# EAGLE board InkTime (EAGLE 9.7.0)
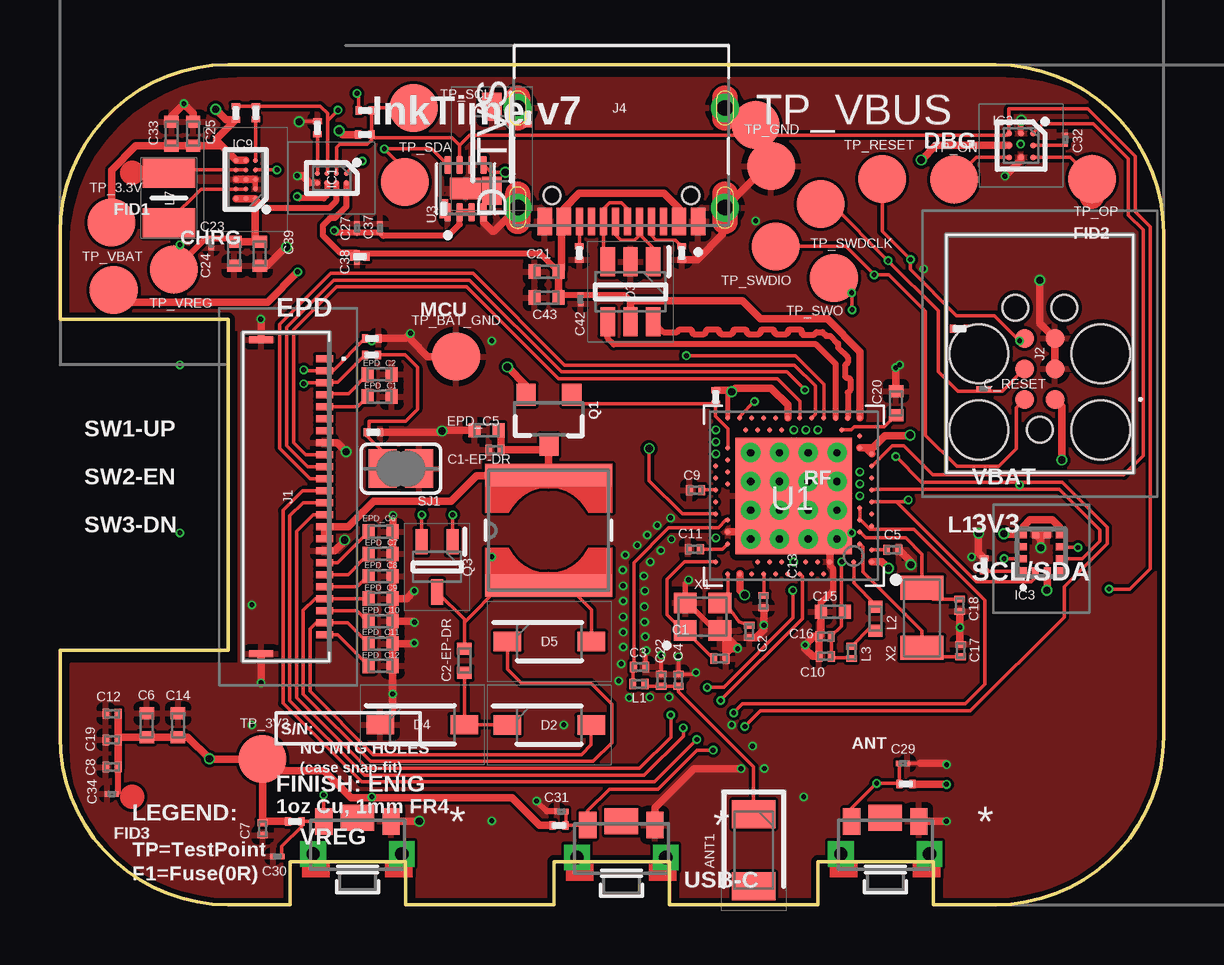
[diagram p0: board, top side]
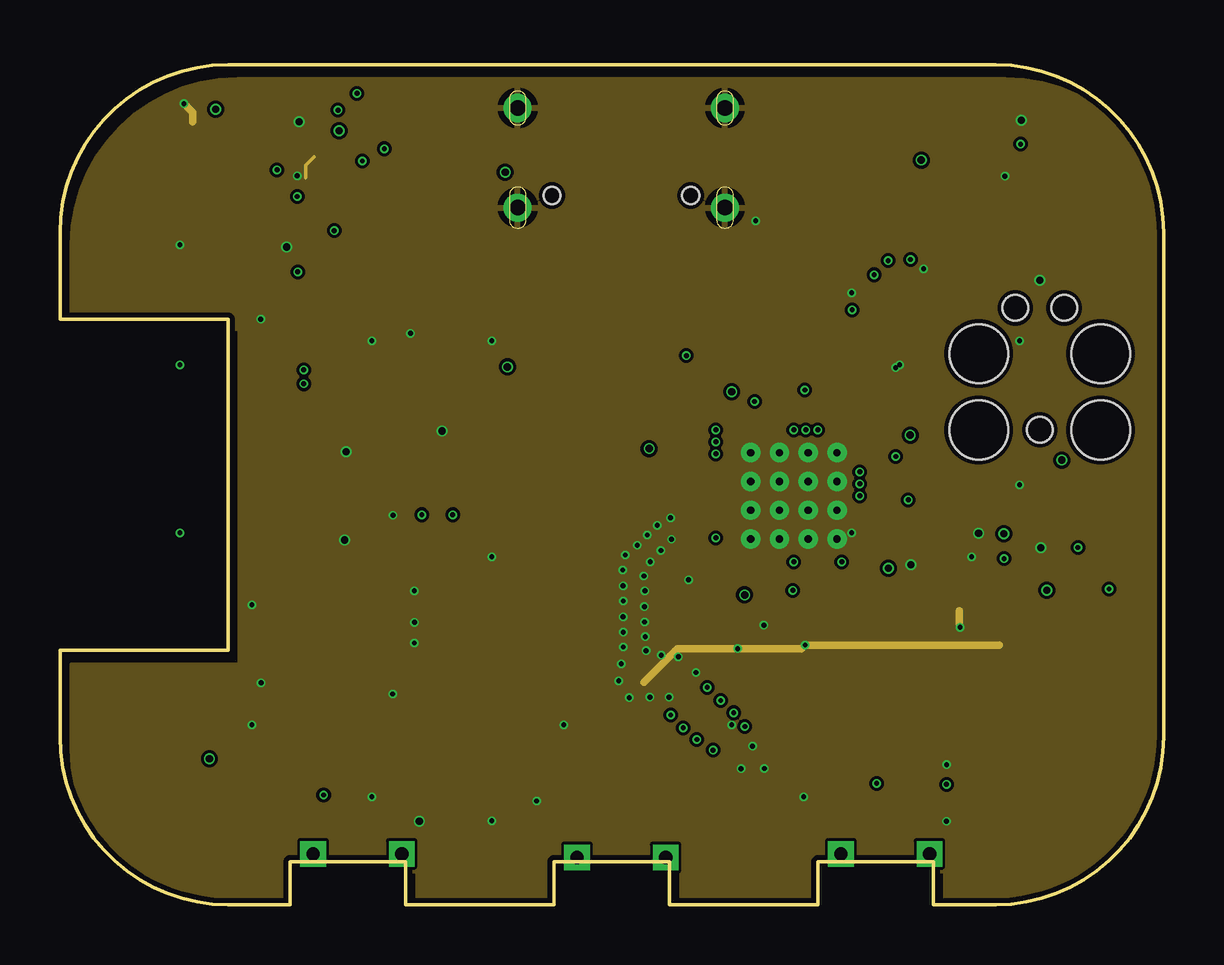
[diagram p1: board, inner layer Route2]
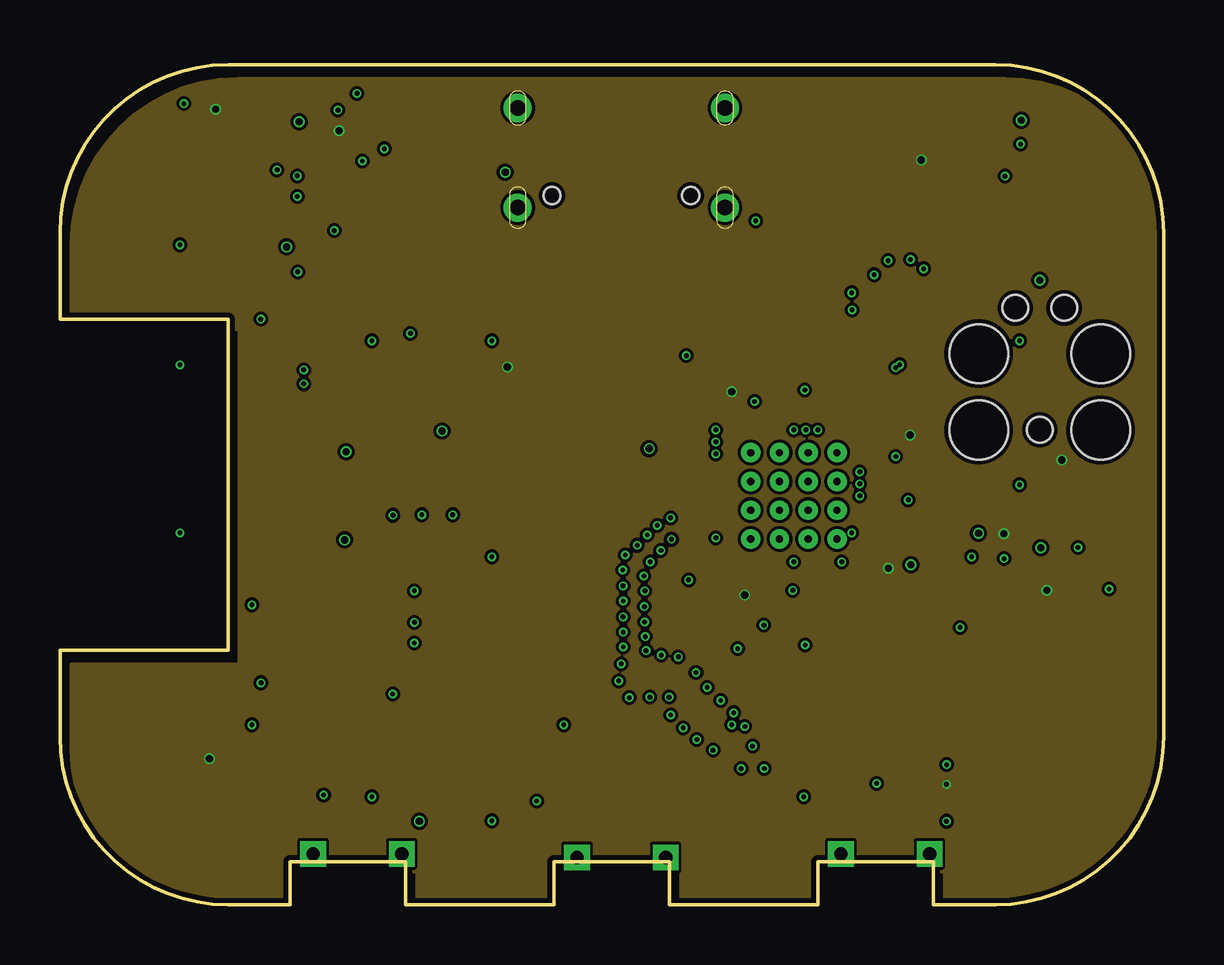
[diagram p2: board, inner layer Route15]
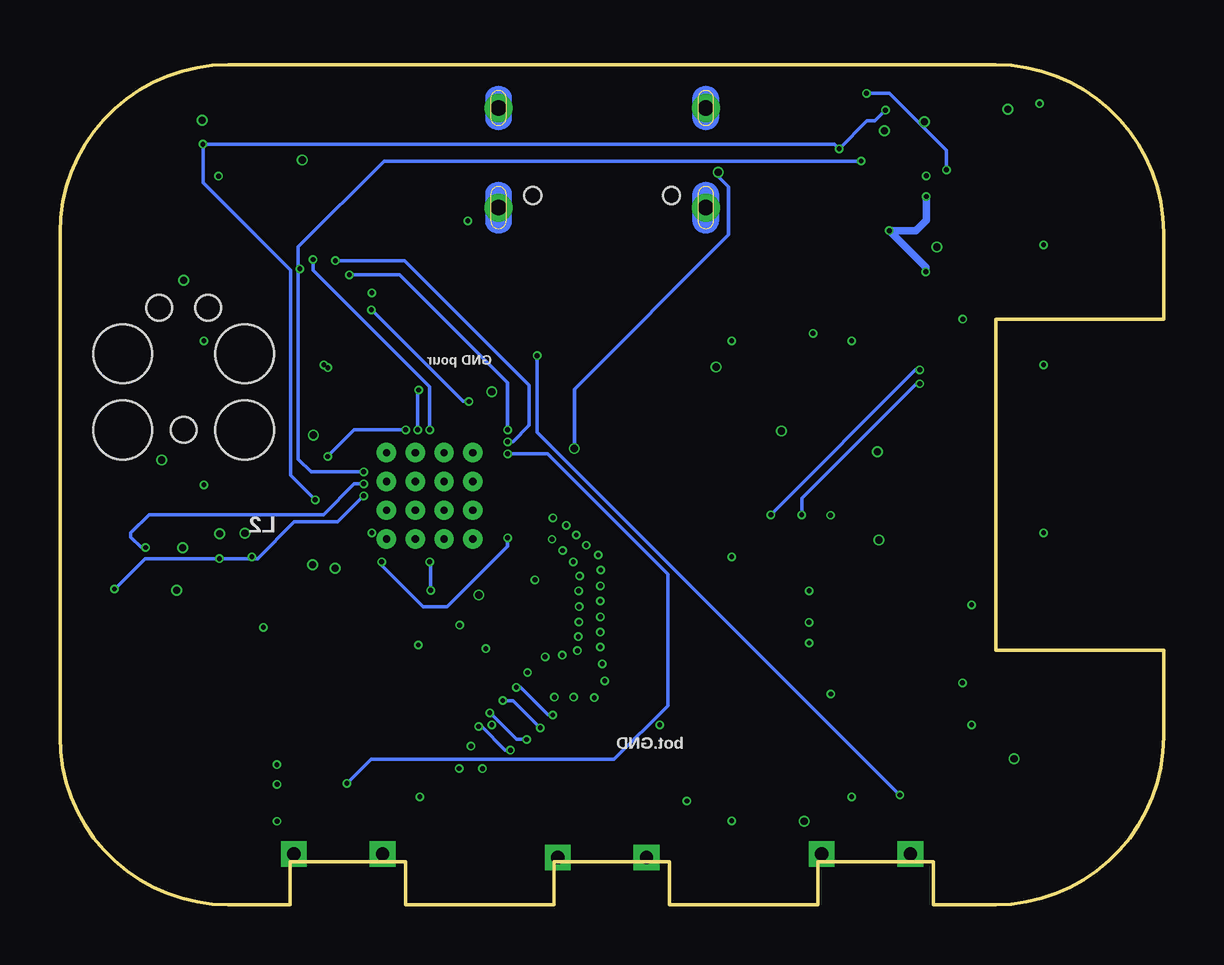
[diagram p3: board, bottom side, seen from below]

Size 46 x 35 mm. Coordinates in mm from the lower left corner, seen from the top.
Outline: 39,0 36.4,0 36.4,1.8 31.6,1.8 31.6,0 25.4,0 25.4,1.8 20.6,1.8 20.6,0 14.4,0 14.4,1.8 9.6,1.8 9.6,0 7,0 arc-90 0,7 0,10.6 7,10.6 7,24.4 0,24.4 0,28 arc-90 7,35 39,35 arc-90 46,28 46,7 arc-90 39,0
Copper layers (1+2*15+16): Top 0.035mm / dielectric 1mm / Route2 0.035mm / dielectric 0.15mm / Route15 0.035mm / dielectric 0.2mm / Bottom 0.035mm
Design rules "jlcpcb-2layers.dru *": minimum track width 5mil, minimum drill 0.2mm, track to track 5mil, track to pad 5mil, pad to pad 5mil, via to via 5mil, smd to smd 5mil, copper to edge 0.2mm, drill to drill 6mil, minimum pad ring 10mil, minimum via ring 3mil, stop-mask expansion 4mil, vias tented up to drill 999mm, thermal gap 10mil

## Footprints (pad centres in the part's own frame; a part is rotated, then mirrored left to right if it is on the bottom)
2450AT18B100E_ANTC3216X140N = smd 1.15 x 1.8: 1 -1.5,0; 2 1.5,0
NORDIC_NRF_3_RESC0201_L = smd 0.28 x 0.43: 1 -0.255,0; 2 0.255,0
NORDIC_NRF_3_RESC0402_L = smd 0.5 x 0.6: 1 -0.5,0; 2 0.5,0
GRM011R60J152KE01L_2_CAPC0201X13N = smd 0.22 x 0.23: 1 -0.185,0; 2 0.185,0
ESP32_C6_LIBRARY_5_SOD3716X135N = smd 1.15 x 0.8: 1 -1.75,0; 2 1.75,0
ESP32_C6_LIBRARY_3_SOT95P280X145-6N = smd 1.2 x 0.6: 1 -1.25,0.95; 2 -1.25,0; 3 -1.25,-0.95; 4 1.25,-0.95; 5 1.25,0; 6 1.25,0.95
CPF0201D7K68C1_0201 = smd 0.35 x 0.25: 1 0,0.275; 2 0,-0.275
BQ25180YBGR_BGA8C40P2X4_100X155X50 = smd 0.2 x 0.2: A1 -0.2,0.6; A2 0.2,0.6; B1 -0.2,0.2; B2 0.2,0.2; C1 -0.2,-0.2; C2 0.2,-0.2; D1 -0.2,-0.6; D2 0.2,-0.6
DRV2605YZFR_BGA9C50P3X3_144X144X62 = smd 0.25 x 0.25: A1 -0.5,0.5; A2 0,0.5; A3 0.5,0.5; B1 -0.5,0; B2 0,0; B3 0.5,0; C1 -0.5,-0.5; C2 0,-0.5; C3 0.5,-0.5
BMA423_BMA423 = smd 0.3 x 0.35: 1 -0.75,-0.775; 2 -0.25,-0.775; 3 0.25,-0.775; 4 0.75,-0.775; 7 0.75,0.775; 8 0.25,0.775; 9 -0.25,0.775; 10 -0.75,0.775 | smd 0.35 x 0.3: 5 0.775,-0.25; 6 0.775,0.25; 11 -0.775,0.25; 12 -0.775,-0.25
RT6160AWSC_BGA15C40P3X5_140X230X60 = smd 0.216 x 0.216: A1 -0.4,0.8; A2 0,0.8; A3 0.4,0.8; B1 -0.4,0.4; B2 0,0.4; B3 0.4,0.4; C1 -0.4,0; C2 0,0; C3 0.4,0; D1 -0.4,-0.4; D2 0,-0.4; D3 0.4,-0.4; E1 -0.4,-0.8; E2 0,-0.8; E3 0.4,-0.8
503480-2400_5034802400 = smd 0.3 x 0.7: 1 -5.75,1.525; 2 -5.25,1.525; 3 -4.75,1.525; 4 -4.25,1.525; 5 -3.75,1.525; 6 -3.25,1.525; 7 -2.75,1.525; 8 -2.25,1.525; 9 -1.75,1.525; 10 -1.25,1.525; 11 -0.75,1.525; 12 -0.25,1.525; 13 0.25,1.525; 14 0.75,1.525; 15 1.25,1.525; 16 1.75,1.525; 17 2.25,1.525; 18 2.75,1.525; 19 3.25,1.525; 20 3.75,1.525; 21 4.25,1.525; 22 4.75,1.525; 23 5.25,1.525; 24 5.75,1.525 | smd 0.3 x 1: MP1 -6.54,-1.125; MP2 6.54,-1.125
TC2030-IDC_TC2030IDC = smd 0.783 x 0.783: 1 -0.953,-0.635; 2 -0.953,0.635; 3 0.317,-0.635; 4 0.317,0.635; 5 1.588,-0.635; 6 1.588,0.635 | hole 2.451: -2.223,-2.54; -2.223,2.54; 0.952,-2.54; 0.952,2.54 | hole 1.067: -2.223,0; 2.857,-1.016; 2.857,1.016
KH-TYPE-C-16P_KINGHELM_KH-TYPE-C-16P = smd 0.6 x 1.15: A1_B12 -3.2,4.725; A4_B9 -2.4,4.725; A9_B4 2.4,4.725; A12_B1 3.2,4.725 | smd 0.3 x 1.15: A5 -1.25,4.725; A6 -0.25,4.725; A7 0.25,4.725; A8 1.25,4.725; B5 1.75,4.725; B6 0.75,4.725; B7 -0.75,4.725; B8 -1.75,4.725 | drill 0.65 pad 1.05: SH1 -4.32,0; SH2 4.32,0; SH3 -4.32,4.15; SH4 4.32,4.15 | hole 0.7: -2.89,3.65; 2.89,3.65
NORDIC_NRF_2_RESC0201_L = smd 0.28 x 0.43: 1 -0.255,0; 2 0.255,0
NORDIC_NRF_2_RESC0402_L = smd 0.5 x 0.6: 1 -0.5,0; 2 0.5,0
ESP32_C6_LIBRARY_2_IND_4828-WE-TPC_WRE = smd 0.9 x 5.3: 1 -2.286,0; 2 2.286,0
MLP2016SR47MT0S1_INDC2016X100N = smd 1.2 x 2.2: 1 -1.028,0; 2 1.028,0
ESP32_C6_LIBRARY_4_ESP32_C6_LIBRARY_4_ESP32_C6_LIBRARY_4_ESP32_C6_LIBRARY_4_ESP32_WROVER_SPARKFUN-DISCRETESEMI_SOT23-3 = smd 0.8 x 0.9: 1 -0.95,-1; 2 0.95,-1; 3 0,1.1
ESP32_C6_LIBRARY_6_SOT65P210X110-3N = smd 1.05 x 0.5: 1 -1.05,0.65; 2 -1.05,-0.65; 3 1.05,0
ESP32_C6_LIBRARY_7_JUMPER_SJ = smd 1.168 x 1.6: 1 -0.762,0; 2 0.762,0
2025-10-22_07-23-44_LIBRARY_SW_EVP-AKE31A_PAN = smd 0.711 x 1.092: 1 -1.4,-0.972; 2 1.4,-0.972 | drill 0.559 pad 0.914 square: 3 -1.848,0.381; 4 1.848,0.381 | smd 1.397 x 1.092: 5 0,-1.124
HECTOR_WATCH_1_TP20R = smd 2 x 2: TP 0,0
NORDIC_NRF_4_AQFN50P700X700X85_HS-74N = smd 4.85 x 4.85: P$74 0,0 | drill 0.3 pad 0.6: P$75 -1.8,1.8; P$76 -0.6,1.8; P$77 0.6,1.8; P$78 1.8,1.8; P$79 -1.8,0.6; P$80 -0.6,0.6; P$81 0.6,0.6; P$82 1.8,0.6; P$83 -1.8,-0.6; P$84 -0.6,-0.6; P$85 0.6,-0.6; P$86 1.8,-0.6; P$87 -1.8,-1.8; P$88 -0.6,-1.8; P$89 0.6,-1.8; P$90 1.8,-1.8 | smd 0.2 x 0.2: P$A8 -1.25,3.25; P$A10 -0.75,3.25; P$A12 -0.25,3.25; P$A14 0.25,3.25; P$A16 0.75,3.25; P$A18 1.25,3.25; P$A20 1.75,3.25; P$A22 2.25,3.25; P$A23 2.75,3.25; P$AA24 3.25,-2.25; P$AB2 -2.75,-2.5; P$AC5 -2,-2.75; P$AC9 -1,-2.75; P$AC11 -0.5,-2.75; P$AC13 0,-2.75; P$AC15 0.5,-2.75; P$AC17 1,-2.75; P$AC19 1.5,-2.75; P$AC21 2,-2.75; P$AC24 3.25,-2.75; P$AD2 -2.75,-3.25; P$AD4 -2.25,-3.25; P$AD6 -1.75,-3.25; P$AD8 -1.25,-3.25; P$AD10 -0.75,-3.25; P$AD12 -0.25,-3.25; P$AD14 0.25,-3.25; P$AD16 0.75,-3.25; P$AD18 1.25,-3.25; P$AD20 1.75,-3.25; P$AD22 2.25,-3.25; P$AD23 2.75,-3.25; P$B1 -3.25,2.75; P$B3 -2.5,2.75; P$B5 -2,2.75; P$B7 -1.5,2.75; P$B9 -1,2.75; P$B11 -0.5,2.75; P$B13 0,2.75; P$B15 0.5,2.75; P$B17 1,2.75; P$B19 1.5,2.75; P$B24 3.25,2.75; P$C1 -3.25,2.25; P$D2 -2.75,2; P$D23 2.75,2; P$E24 3.25,1.75; P$F2 -2.75,1.5; P$F23 2.75,1.5; P$G1 -3.25,1.25; P$H2 -2.75,1; P$H23 2.75,1; P$J1 -3.25,0.75; P$J24 3.25,0.75; P$K2 -2.75,0.5; P$L1 -3.25,0.25; P$L24 3.25,0.25; P$M2 -2.75,0; P$N1 -3.25,-0.25; P$N24 3.25,-0.25; P$P2 -2.75,-0.5; P$P23 2.75,-0.5; P$R1 -3.25,-0.75; P$R24 3.25,-0.75; P$T2 -2.75,-1; P$T23 2.75,-1; P$U1 -3.25,-1.25; P$U24 3.25,-1.25; P$V23 2.75,-1.5; P$W1 -3.25,-1.75; P$W24 3.25,-1.75; P$Y2 -2.75,-2; P$Y23 2.75,-2
ESP32_C6_LIBRARY_SON50P200X200X80-9N = smd 0.76 x 0.27: 1 -0.985,0.75; 2 -0.985,0.25; 3 -0.985,-0.25; 4 -0.985,-0.75; 5 0.985,-0.75; 6 0.985,-0.25; 7 0.985,0.25; 8 0.985,0.75 | smd 0.9 x 1.3: 9 0,0
NORDIC_NRF_BT-XTAL_2016_N = smd 0.95 x 0.85: 1 -0.725,-0.575; 2 0.725,-0.575; 3 0.725,0.575; 4 -0.725,0.575
NORDIC_NRF_1_XTAL_3215_N = smd 1 x 1.8: 1 -1.25,0; 2 1.25,0

## Placement (x,y rotation side)
ANT1  2450AT18B100E_2450AT18B100E  [2450AT18B100E_ANTC3216X140N]  28.92,2.27 270 top
C1  12pF  [NORDIC_NRF_3_RESC0201_L]  27.51,10.26 0 top
C1-EP-DR  10uF  [NORDIC_NRF_3_RESC0402_L]  17.78,19.77 180 top
C2  12pF  [NORDIC_NRF_3_RESC0201_L]  28.73,11.39 270 top
C2-EP-DR  4.7uF/25V  [NORDIC_NRF_3_RESC0402_L]  16.86,10.16 90 top
C3  1pF  [NORDIC_NRF_3_RESC0201_L]  24.16,9.91 0 top
C4  1pF  [NORDIC_NRF_3_RESC0201_L]  25.78,9.36 90 top
C5  100nF  [NORDIC_NRF_3_RESC0201_L]  34.71,14.79 0 top
C6  4.7uF  [NORDIC_NRF_3_RESC0402_L]  3.62,7.48 90 top
C7  100nF  [NORDIC_NRF_3_RESC0201_L]  8.45,3.16 270 top
C8  100nF  [NORDIC_NRF_3_RESC0201_L]  2.17,5.74 180 top
C9  820pF (N.C.)  [NORDIC_NRF_3_RESC0201_L]  26.49,17.27 180 top
C10  N.C.  [NORDIC_NRF_3_RESC0201_L]  31.9,10.35 180 top
C11  100pF  [NORDIC_NRF_3_RESC0201_L]  26.44,14.81 180 top
C12  100nF  [NORDIC_NRF_3_RESC0201_L]  2.17,7.96 180 top
C13  N.C.  [NORDIC_NRF_3_RESC0201_L]  29.32,12.63 270 top
C14  4.7uF  [NORDIC_NRF_3_RESC0402_L]  4.92,7.48 90 top
C15  1uF  [NORDIC_NRF_3_RESC0402_L]  32.21,12.21 180 top
C16  47nF  [NORDIC_NRF_3_RESC0201_L]  31.89,11.18 180 top
C17  12pF  [NORDIC_NRF_3_RESC0201_L]  37.54,10.59 270 top
C18  12pF  [NORDIC_NRF_3_RESC0201_L]  37.5,12.48 90 top
C19  100nF  [NORDIC_NRF_3_RESC0201_L]  2.17,6.87 180 top
C20  4.7uF  [NORDIC_NRF_3_RESC0402_L]  34.85,20.9 90 top
C21  4.7uF  [NORDIC_NRF_3_RESC0402_L]  20.29,26.38 180 top
C22  N.C.  [NORDIC_NRF_3_RESC0201_L]  25.06,9.36 90 top
C23  0.1uF  [GRM011R60J152KE01L_2_CAPC0201X13N]  6.31,27.57 270 top
C24  10uF  [NORDIC_NRF_3_RESC0402_L]  7.27,27.12 90 top
C25  22uF  [NORDIC_NRF_3_RESC0402_L]  5.55,32.13 90 top
C27  0.1uF  [GRM011R60J152KE01L_2_CAPC0201X13N]  12.38,28.19 90 top
C29  1uF  [GRM011R60J152KE01L_2_CAPC0201X13N]  35.14,5.89 0 top
C30  1uF  [GRM011R60J152KE01L_2_CAPC0201X13N]  9.06,2.02 180 top
C31  1uF  [GRM011R60J152KE01L_2_CAPC0201X13N]  20.9,3.89 180 top
C32  1uF  [GRM011R60J152KE01L_2_CAPC0201X13N]  41.9,31.88 90 top
C33  22uF  [NORDIC_NRF_3_RESC0402_L]  4.65,32.12 90 top
C34  0.1uF  [GRM011R60J152KE01L_2_CAPC0201X13N]  2.16,4.62 180 top
C37  1uF  [GRM011R60J152KE01L_2_CAPC0201X13N]  13.34,28.19 90 top
C38  1uF  [GRM011R60J152KE01L_2_CAPC0201X13N]  12.38,26.97 270 top
C39  10uF  [NORDIC_NRF_3_RESC0402_L]  8.33,27.12 270 top
C42  0.1uF  [GRM011R60J152KE01L_2_CAPC0201X13N]  21.7,25.23 270 top
C43  4.7uF  [NORDIC_NRF_3_RESC0402_L]  20.29,25.3 180 top
C_RESET  100nF/10V  [GRM011R60J152KE01L_2_CAPC0201X13N]  38.5,21.5 0 top
D2  MBR0530  [ESP32_C6_LIBRARY_5_SOD3716X135N]  20.39,7.49 0 top
D3  USBLC6-2SC6Y  [ESP32_C6_LIBRARY_3_SOT95P280X145-6N]  23.78,25.54 270 top
D4  MBR0530  [ESP32_C6_LIBRARY_5_SOD3716X135N]  15.1,7.5 0 top
D5  MBR0530  [ESP32_C6_LIBRARY_5_SOD3716X135N]  20.4,10.97 0 top
D_TVS  MBR0530 (TVS)  [ESP32_C6_LIBRARY_5_SOD3716X135N]  18,31.5 270 top
EPD_C1  1uF/50V  [NORDIC_NRF_3_RESC0402_L]  13.33,21.17 180 top
EPD_C2  1uF/50V  [NORDIC_NRF_3_RESC0402_L]  13.33,22.1 180 top
EPD_C5  0.1uF/50V  [NORDIC_NRF_3_RESC0201_L]  18.13,18.95 0 top
EPD_C6  1uF/50V  [NORDIC_NRF_3_RESC0402_L]  13.37,15.55 180 top
EPD_C7  1uF/50V  [NORDIC_NRF_3_RESC0402_L]  13.37,14.62 180 top
EPD_C8  1uF/50V  [NORDIC_NRF_3_RESC0402_L]  13.37,13.69 180 top
EPD_C9  1uF/50V  [NORDIC_NRF_3_RESC0402_L]  13.37,12.76 180 top
EPD_C10  1uF/50V  [NORDIC_NRF_3_RESC0402_L]  13.37,11.82 180 top
EPD_C11  1uF/50V  [NORDIC_NRF_3_RESC0402_L]  13.37,10.88 180 top
EPD_C12  1uF/50V  [NORDIC_NRF_3_RESC0402_L]  13.37,9.95 180 top
F1  0R (FUSE)  [CPF0201D7K68C1_0201]  19.5,32.8 0 top
IC1  BQ25180YBGR_BQ25180YBGR  [BQ25180YBGR_BGA8C40P2X4_100X155X50]  11.33,30.28 270 top
IC2  DRV2605YZFR_DRV2605YZFR  [DRV2605YZFR_BGA9C50P3X3_144X144X62]  40.06,31.64 270 top
IC3  BMA423_BMA423  [BMA423_BMA423]  40.9,14.67 0 top
IC9  RT6160AWSC_RT6160AWSC  [RT6160AWSC_BGA15C40P3X5_140X230X60]  7.74,30.22 180 top
J1  503480-2400_503480-2400  [503480-2400_5034802400]  9.5,17 270 top
J2  TC2030-IDC_TC2030-IDC  [TC2030-IDC_TC2030IDC]  40.84,22.01 90 top
J4  KH-TYPE-C-16P  [KH-TYPE-C-16P_KINGHELM_KH-TYPE-C-16P]  23.4,33.2 180 top
L1  3.9nH  [NORDIC_NRF_2_RESC0201_L]  24.13,9.2 0 top
L2  10uH  [NORDIC_NRF_2_RESC0402_L]  33.99,11.92 270 top
L3  15nH  [NORDIC_NRF_2_RESC0201_L]  33,10.52 270 top
L5  68uH  [ESP32_C6_LIBRARY_2_IND_4828-WE-TPC_WRE]  20.37,15.6 90 top
L7  MLP2016SR47MT0S1_FTC252012SR47MBCA  [MLP2016SR47MT0S1_INDC2016X100N]  4.54,29.45 90 top
Q1  20V/4.2A/52mΩ/1.4W  [ESP32_C6_LIBRARY_4_ESP32_C6_LIBRARY_4_ESP32_C6_LIBRARY_4_ESP32_C6_LIBRARY_4_ESP32_WROVER_SPARKFUN-DISCRETESEMI_SOT23-3]  20.38,20.25 180 top
Q3  SI1308EDL-T1-GE3  [ESP32_C6_LIBRARY_6_SOT65P210X110-3N]  15.72,14.08 270 top
R1_EP_DR  0.47  [CPF0201D7K68C1_0201]  12.99,22.91 270 top
R1_USB  5K1  [CPF0201D7K68C1_0201]  25.92,27.16 180 top
R2  0  [CPF0201D7K68C1_0201]  8.16,33 180 top
R2_EP_DR  10K  [CPF0201D7K68C1_0201]  13,23.6 270 top
R2_USB  5K1  [CPF0201D7K68C1_0201]  21.65,27.16 0 top
R3  0  [CPF0201D7K68C1_0201]  38.52,14.17 180 top
R4  0  [CPF0201D7K68C1_0201]  12.72,33.09 90 top
R5  10K  [CPF0201D7K68C1_0201]  9.79,3.47 270 top
R7  10K  [CPF0201D7K68C1_0201]  35.26,5.03 90 top
R8  10K  [CPF0201D7K68C1_0201]  20.8,3.31 270 top
R9  10K  [CPF0201D7K68C1_0201]  10.73,32.37 0 top
R17  3K3  [CPF0201D7K68C1_0201]  12.71,32.09 90 top
R18  3K3  [CPF0201D7K68C1_0201]  7.33,32.99 180 top
R_ALERT  100K  [CPF0201D7K68C1_0201]  16,29 180 top
R_PMIC_INT  100K  [CPF0201D7K68C1_0201]  12.5,27 90 top
R_PWR_EPD  10K  [CPF0201D7K68C1_0201]  27.33,21.16 180 top
R_RESET  10K  [CPF0201D7K68C1_0201]  37.5,24 90 top
R_TYPE_SEL  2.2  [CPF0201D7K68C1_0201]  13.06,19.69 270 top
SJ1  SJ  [ESP32_C6_LIBRARY_7_JUMPER_SJ]  14.21,18.17 180 top
SW_DN  2025-10-22_07-23-44_LIBRARY_EVP-AKE31ASW_EVP-AKE31A_PAN  [2025-10-22_07-23-44_LIBRARY_SW_EVP-AKE31A_PAN]  34.4,2.5 180 top
SW_ENT  2025-10-22_07-23-44_LIBRARY_EVP-AKE31ASW_EVP-AKE31A_PAN  [2025-10-22_07-23-44_LIBRARY_SW_EVP-AKE31A_PAN]  23.4,2.35 180 top
SW_UP  2025-10-22_07-23-44_LIBRARY_EVP-AKE31ASW_EVP-AKE31A_PAN  [2025-10-22_07-23-44_LIBRARY_SW_EVP-AKE31A_PAN]  12.4,2.5 180 top
TP_3.3V  HECTOR_WATCH_1_TPTP20R  [HECTOR_WATCH_1_TP20R]  2.15,28.43 0 top
TP_3V3  HECTOR_WATCH_1_TPTP20R  [HECTOR_WATCH_1_TP20R]  8.43,6.07 0 top
TP_BAT_GND  HECTOR_WATCH_1_TPTP20R  [HECTOR_WATCH_1_TP20R]  16.51,22.84 0 top
TP_GND  HECTOR_WATCH_1_TPTP20R  [HECTOR_WATCH_1_TP20R]  29.64,30.78 0 top
TP_ON  HECTOR_WATCH_1_TPTP20R  [HECTOR_WATCH_1_TP20R]  37.27,30.22 0 top
TP_OP  HECTOR_WATCH_1_TPTP20R  [HECTOR_WATCH_1_TP20R]  43.02,30.24 0 top
TP_RESET  HECTOR_WATCH_1_TPTP20R  [HECTOR_WATCH_1_TP20R]  34.28,30.25 0 top
TP_SCL  HECTOR_WATCH_1_TPTP20R  [HECTOR_WATCH_1_TP20R]  14.74,33.2 0 top
TP_SDA  HECTOR_WATCH_1_TPTP20R  [HECTOR_WATCH_1_TP20R]  14.37,30.12 0 top
TP_SWDCLK  HECTOR_WATCH_1_TPTP20R  [HECTOR_WATCH_1_TP20R]  31.7,29.2 0 top
TP_SWDIO  HECTOR_WATCH_1_TPTP20R  [HECTOR_WATCH_1_TP20R]  29.84,27.42 0 top
TP_SWO  HECTOR_WATCH_1_TPTP20R  [HECTOR_WATCH_1_TP20R]  32.26,26.11 0 top
TP_VBAT  HECTOR_WATCH_1_TPTP20R  [HECTOR_WATCH_1_TP20R]  2.24,25.61 0 top
TP_VBUS  VBUS  [HECTOR_WATCH_1_TP20R]  29,32.5 0 top
TP_VREG  HECTOR_WATCH_1_TPTP20R  [HECTOR_WATCH_1_TP20R]  4.75,26.47 0 top
U1  NORDIC_NRF_4_NRF52840_QF  [NORDIC_NRF_4_AQFN50P700X700X85_HS-74N]  30.59,17.04 180 top
U3  MAX17048G+T10  [ESP32_C6_LIBRARY_SON50P200X200X80-9N]  16.91,29.84 90 top
X1  32MHz  [NORDIC_NRF_BT-XTAL_2016_N]  26.79,12 0 top
X2  32.768kHz  [NORDIC_NRF_1_XTAL_3215_N]  35.93,11.95 270 top

## Library data of the parts
ANT1 = InkTime_v5; ARROW_PART_NUMBER: 2450AT18B100E; ARROW_PRICE-STOCK: https://www.arrow.com/en/products/2450at18b100e/johanson-dielectrics?utm_currency=USD&region=nac; DESCRIPTION: Antennas 2.45GHz ANTENNA; HEIGHT: 1.4mm; MANUFACTURER_NAME: JOHANSON TECHNOLOGY; MANUFACTURER_PART_NUMBER: 2450AT18B100E; MOUSER_PART_NUMBER: 609-2450AT18B100E; MOUSER_PRICE-STOCK: https://www.mouser.co.uk/ProductDetail/Johanson-Technology/2450AT18B100E?qs=yCnrNFeXz%252Bh5MFsFIXGZGA%3D%3D
C1 C1-EP-DR C2 C2-EP-DR C3-C22 C24 C25 C33 C39 C43 C_RESET D_TVS EPD_C1 EPD_C2 EPD_C5-EPD_C12 F1 L1-L3 R1_EP_DR R1_USB R2 R2_EP_DR R2_USB R3-R5 R7-R9 R17 R18 R_ALERT R_PMIC_INT R_PWR_EPD R_RESET R_TYPE_SEL SJ1 TP_3.3V TP_3V3 TP_BAT_GND TP_GND TP_ON TP_OP TP_RESET TP_SCL TP_SDA TP_SWDCLK TP_SWDIO TP_SWO TP_VBAT TP_VBUS TP_VREG U1 X1 X2 = InkTime_v5
C23 C27 C29-C32 C34 C37 C38 C42 = InkTime_v5; AVAILABILITY: In Stock; CHECK_PRICES: https://www.snapeda.com/parts/GRM011R60J152KE01L/Murata/view-part/?ref=eda; DESCRIPTION: SMD Capacitor X5R(EIA) with Capacitance: 1500pF Tol. 10%. Rated Voltage: 6.3Vdc; MF: Murata; MP: GRM011R60J152KE01L; PACKAGE: 0201 Murata; PRICE: None; SNAPEDA_LINK: https://www.snapeda.com/parts/GRM011R60J152KE01L/Murata/view-part/?ref=snap
D2 D4 D5 = InkTime_v5; AVAILABILITY: In Stock; CHECK_PRICES: https://www.snapeda.com/parts/MBR0530/Onsemi/view-part/?ref=eda; DESCRIPTION: Diode Schottky 30 V 500mA Surface Mount SOD-123; MF: ON Semiconductor; MP: MBR0530; PACKAGE: SOD-123-2 ON Semiconductor; PRICE: None; PURCHASE-URL: https://www.snapeda.com/api/url_track_click_mouser/?unipart_id=179458&manufacturer=ON Semiconductor&part_name=MBR0530&search_term=None; SNAPEDA_LINK: https://www.snapeda.com/parts/MBR0530/Onsemi/view-part/?ref=snap
D3 = InkTime_v5; AVAILABILITY: In Stock; CHECK_PRICES: https://www.snapeda.com/parts/USBLC6-2SC6Y/STMicroelectronics/view-part/?ref=eda; DESCRIPTION: 17V Clamp 5A (8/20µs) Ipp Tvs Diode Surface Mount SOT-23-6; MF: STMicroelectronics; MP: USBLC6-2SC6Y; PACKAGE: SOT-23-6 STMicroelectronics; PRICE: None; SNAPEDA_LINK: https://www.snapeda.com/parts/USBLC6-2SC6Y/STMicroelectronics/view-part/?ref=snap
IC1 = InkTime_v5; ARROW_PART_NUMBER: BQ25180YBGR; ARROW_PRICE-STOCK: https://www.arrow.com/en/products/bq25180ybgr/texas-instruments?utm_currency=USD&region=nac; DESCRIPTION: Charger IC Lithium Ion/Polymer, Lithium Iron Phosphate 8-DSBGA (1.6x1.1); HEIGHT: 0.5mm; MANUFACTURER_NAME: Texas Instruments; MANUFACTURER_PART_NUMBER: BQ25180YBGR; MOUSER_PART_NUMBER: 595-BQ25180YBGR; MOUSER_PRICE-STOCK: https://www.mouser.co.uk/ProductDetail/Texas-Instruments/BQ25180YBGR?qs=doiCPypUmgEWjAK%252BJAX6Tw%3D%3D
IC2 = InkTime_v5; ARROW_PART_NUMBER: DRV2605YZFR; ARROW_PRICE-STOCK: https://www.arrow.com/en/products/drv2605yzfr/texas-instruments?region=nac; DESCRIPTION: Haptic Driver for ERM/LRA with Built-In Library and Smart Loop Architecture; HEIGHT: 0.625mm; MANUFACTURER_NAME: Texas Instruments; MANUFACTURER_PART_NUMBER: DRV2605YZFR
IC3 = InkTime_v5; ARROW_PART_NUMBER: BMA423; ARROW_PRICE-STOCK: https://www.arrow.com/en/products/bma423/bosch; DESCRIPTION: Accelerometers Triaxial low-g 12bit Acceleration Sensor; HEIGHT: 1mm; MANUFACTURER_NAME: BOSCH; MANUFACTURER_PART_NUMBER: BMA423; MOUSER_PART_NUMBER: 262-BMA423; MOUSER_PRICE-STOCK: https://www.mouser.co.uk/ProductDetail/Bosch-Sensortec/BMA423?qs=HXFqYaX1Q2xC%252BSgeGoX3mg%3D%3D
IC9 = InkTime_v5; DESCRIPTION: Buck-Boost Regulator Positive Output Step-Up/Step-Down I2C DC-DC Controller IC 15-WL-CSP (BSC) (1.4x2.3); HEIGHT: 0.6mm; MANUFACTURER_NAME: RICHTEK; MANUFACTURER_PART_NUMBER: RT6160AWSC; MOUSER_PART_NUMBER: 835-RT6160AWSC; MOUSER_PRICE-STOCK: https://www.mouser.co.uk/ProductDetail/Richtek/RT6160AWSC?qs=amGC7iS6iy%2FLd9PSoixZXQ%3D%3D
J1 = InkTime_v5; DESCRIPTION: FFC & FPC Connectors 0.5mm FPC RA SMT Dual Contact 24Ckt; HEIGHT: 1.87mm; MANUFACTURER_NAME: Molex; MANUFACTURER_PART_NUMBER: 503480-2400; MOUSER_PART_NUMBER: 538-503480-2400; MOUSER_PRICE-STOCK: https://www.mouser.co.uk/ProductDetail/Molex/503480-2400?qs=OAhjpuo3Vu7efIoxFh9AOw%3D%3D
J2 = InkTime_v5; DESCRIPTION: CABLE ADAPTER 6 POS; HEIGHT: 19mm; MANUFACTURER_NAME: Tag Connect; MANUFACTURER_PART_NUMBER: TC2030-IDC
J4 = InkTime_v5; AVAILABILITY: Not in stock; CHECK_PRICES: https://www.snapeda.com/parts/KH-TYPE-C-16P/Kinghelm/view-part/?ref=eda; MF: kinghelm; MP: KH-TYPE-C-16P; PACKAGE: None; PRICE: None; SNAPEDA_LINK: https://www.snapeda.com/parts/KH-TYPE-C-16P/Kinghelm/view-part/?ref=snap
L5 = InkTime_v5; COPYRIGHT: Copyright (C) 2024 Ultra Librarian. All rights reserved.; MANUFACTURER_PART_NUMBER: 744043680; MFR_NAME: Wurth Electronics
L7 = InkTime_v5; DESCRIPTION: SMD / SMT Inductors (Coils), L=0.47?H, L x W x T :; HEIGHT: 1mm; JLCPCB: https://jlcpcb.com/partdetail/6763488-FTC252012SR47MBCA/C5832368; MANUFACTURER_NAME: TDK; MANUFACTURER_PART_NUMBER: FTC252012SR47MBCA
Q1 = InkTime_v5; PROD_ID: TRAN-14388
Q3 = InkTime_v5; AVAILABILITY: In Stock; CHECK_PRICES: https://www.snapeda.com/parts/SI1308EDL-T1-GE3/Vishay+Siliconix/view-part/?ref=eda; DESCRIPTION: Si1308EDL-T1-GE3 N-channel MOSFET Transistor, 1.5 A, 30 V, 3-Pin SC-70 | Siliconix / Vishay SI1308EDL-T1-GE3; MF: Vishay Siliconix; MP: SI1308EDL-T1-GE3; PACKAGE: SOT-323 Vishay Semiconductor; PRICE: None; PURCHASE-URL: https://www.snapeda.com/api/url_track_click_mouser/?unipart_id=274603&manufacturer=Vishay Siliconix&part_name=SI1308EDL-T1-GE3&search_term=None; SNAPEDA_LINK: https://www.snapeda.com/parts/SI1308EDL-T1-GE3/Vishay+Siliconix/view-part/?ref=snap
SW_DN SW_ENT SW_UP = InkTime_v5; COPYRIGHT: Copyright (C) 2025 Ultra Librarian. All rights reserved.; DIGI-KEY_PART_NUMBER_1: P123437TR-ND; DIGI-KEY_PART_NUMBER_2: P123437CT-ND; DIGI-KEY_PART_NUMBER_3: P123437DKR-ND; MANUFACTURER_NAME: Panasonic; MANUFACTURER_PART_NUMBER: EVP-AKE31A
U3 = InkTime_v5; AVAILABILITY: In Stock; CHECK_PRICES: https://www.snapeda.com/parts/MAX17048G+T10/Analog+Devices/view-part/?ref=eda; DESCRIPTION: 3µA 1-Cell/2-Cell Fuel Gauge with ModelGauge; MF: Analog Devices; MP: MAX17048G+T10; PACKAGE: TDFN-8 Maxim; PRICE: None; PURCHASE-URL: https://www.snapeda.com/api/url_track_click_mouser/?unipart_id=329239&manufacturer=Analog Devices&part_name=MAX17048G+T10&search_term=None; SNAPEDA_LINK: https://www.snapeda.com/parts/MAX17048G+T10/Analog+Devices/view-part/?ref=snap

## Nets
3V3: C6.1 C7.1 C8.1 C12.1 C14.1 C19.1 C25.1 C33.1 C34.1 IC2.C2 IC3.3 IC3.7 IC3.10 IC9.E2 IC9.E3 J2.1 Q1.2 R5.2 R7.2 R8.2 R17.1 R18.1 R_ALERT.2 R_PMIC_INT.2 R_PWR_EPD.2 R_RESET.2 TP_3.3V.TP TP_3V3.TP U1.P$A22 U1.P$AD14 U1.P$AD23 U1.P$B1 U1.P$W1 U1.P$Y2
ALERT: R_ALERT.1 U1.P$J24 U3.5
D+: D3.4 U1.P$AD6
D-: D3.6 U1.P$AD4
DEC4_6: C10.1 C15.1 C16.1 L3.2 U1.P$B5 U1.P$E24
DN: D3.1 J4.A7 J4.B7
DP: D3.3 J4.A6 J4.B6
EPD_3V3: C1-EP-DR.1 EPD_C5.2 J1.15 J1.16 L5.2 Q1.3
EPD_BUSY: J1.9 U1.P$AD12
EPD_CS: J1.12 U1.P$K2
EPD_DC: J1.11 U1.P$AD10
EPD_RST: J1.10 U1.P$AC11
GDR: J1.2 Q3.1 R2_EP_DR.2
GND: C1-EP-DR.2 C1.2 C2.2 C3.2 C4.2 C5.2 C6.2 C7.2 C8.2 C9.2 C10.2 C11.2 C12.2 C13.2 C14.2 C15.2 C16.2 C17.1 C18.1 C19.2 C20.2 C21.2 C22.2 C23.2 C24.1 C25.2 C27.2 C29.2 C30.2 C31.2 C32.2 C33.2 C34.2 C37.2 C38.2 C39.2 C42.2 C43.2 C_RESET.2 D3.2 D4.1 D_TVS.1 EPD_C1.1 EPD_C2.1 EPD_C5.1 EPD_C6.1 EPD_C7.1 EPD_C8.1 EPD_C9.1 EPD_C10.1 EPD_C11.1 EPD_C12.1 IC1.D2 IC2.B1 IC2.B3 IC3.8 IC3.9 IC9.B1 IC9.C1 IC9.C2 IC9.C3 J1.8 J1.17 J1.MP1 J1.MP2 J2.3 J2.5 J4.A1_B12 J4.A12_B1 J4.SH1 J4.SH2 J4.SH3 J4.SH4 R1_USB.1 R2_EP_DR.1 R2_USB.2 R3.2 R9.1 R_TYPE_SEL.1 SJ1.1 SW_DN.1 SW_ENT.1 SW_UP.1 TP_BAT_GND.TP TP_GND.TP U1.P$74 U1.P$75 U1.P$76 U1.P$77 U1.P$78 U1.P$79 U1.P$80 U1.P$81 U1.P$82 U1.P$83 U1.P$84 U1.P$85 U1.P$86 U1.P$87 U1.P$88 U1.P$89 U1.P$90 U1.P$B7 U1.P$F23 U3.1 U3.4 U3.6 U3.9 X1.2 X1.4
HAPTIC_EN: IC2.A1 U1.P$U1
IMU_INT1: IC3.5 U1.P$N1
IMU_INT2: IC3.6 U1.P$P2
LX1: IC9.B2 IC9.B3 L7.1
LX2: IC9.D2 IC9.D3 L7.2
MOSI: J1.14 U1.P$B13
N$1: L2.2 L3.1
N$2: IC9.D1 R4.1
N$3: C32.1 IC2.A2
N$4: IC9.E1 R2.1
N$6: IC3.1 R3.1
N$7: C5.1 U1.P$C1
N$8: IC1.D1 R9.2
N$9: C2-EP-DR.1 D2.1 D4.2
N$10: EPD_C6.2 J1.18
N$11: R1_EP_DR.1 R_TYPE_SEL.2 SJ1.2
N$12: J4.A5 R1_USB.2
N$14: EPD_C2.2 J1.4
N$15: EPD_C1.2 J1.5
N$16: J4.B5 R2_USB.1
N$18: EPD_C7.2 J1.19
N$19: C2-EP-DR.2 D5.2 L5.1 Q3.3
N$20: C20.1 U1.P$AC5
N$21: EPD_C8.2 J1.20
N$22: EPD_C12.2 J1.24
N$24: EPD_C10.2 J1.22
N$40: L2.1 U1.P$B3
N$43: C13.1 U1.P$A18
N$58: C9.1 U1.P$N24
N$59: C11.1 U1.P$D23
N$60: C2.1 U1.P$A23 X1.3
N$61: C1.1 U1.P$B24 X1.1
N$62: C3.1 L1.1 U1.P$H23
N$63: ANT1.1 C4.1 C22.1 L1.2
OUT+: IC2.A3 TP_OP.TP
OUT-: IC2.C3 TP_ON.TP
P0.00/XL1: C17.2 U1.P$D2 X2.2
P0.00/XL2: C18.2 U1.P$F2 X2.1
P0.04: U1.P$J1
P0.09: U1.P$L24
P0.13: C30.1 R5.1 SW_UP.2 U1.P$AD8
P0.14: C31.1 R8.1 SW_ENT.2 U1.P$AC9
P0.19: U1.P$AC15
P0.20: U1.P$AD16
P0.21: U1.P$AC17
P0.22: U1.P$AD18
P0.23: U1.P$AC19
P0.24: U1.P$AD20
P0.25: U1.P$AC21
P0.26: U1.P$G1
P0.27: U1.P$H2
P0.28: U1.P$B11
P0.29: U1.P$A10
P0.30: U1.P$B9
P0.31: U1.P$A8
P1.01: Q1.1 R_PWR_EPD.1 U1.P$Y23
P1.02: C29.1 R7.1 SW_DN.2 U1.P$W24
P1.03: U1.P$V23
P1.04: U1.P$U24
P1.05: U1.P$T23
P1.06: U1.P$R24
P1.07: U1.P$P23
P1.09: U1.P$R1
P1.10: U1.P$A20
P1.11: U1.P$B19
P1.12: U1.P$B17
P1.13: U1.P$A16
P1.14: U1.P$B15
P1.15: U1.P$A14
PMIC_INT: IC1.A1 R_PMIC_INT.1 U1.P$T2
PREVGH: D5.1 EPD_C9.2 J1.21
PREVGL: D2.2 EPD_C11.2 J1.23
RESE: J1.3 Q3.2 R1_EP_DR.2
RESET: C_RESET.1 J2.6 R_RESET.1 TP_RESET.TP U1.P$AC13
SCK: J1.13 U1.P$A12
SCL: IC1.B1 IC2.C1 IC3.12 R4.2 R17.2 TP_SCL.TP U1.P$M2 U3.7
SDA: IC1.C1 IC2.B2 IC3.2 R2.2 R18.2 TP_SDA.TP U1.P$L1 U3.8
SWDCLK: J2.4 TP_SWDCLK.TP U1.P$AA24
SWDIO: J2.2 TP_SWDIO.TP U1.P$AC24
SWO: TP_SWO.TP U1.P$AD22
VBAT: C27.1 C37.1 IC1.C2 TP_VBAT.TP U3.2 U3.3
VBUS: C21.1 C38.1 C42.1 C43.1 D3.5 D_TVS.2 F1.1 F1.2 IC1.A2 J4.A4_B9 J4.A9_B4 TP_VBUS.TP U1.P$AD2
VREG: C23.1 C24.2 C39.1 IC1.B2 IC9.A1 IC9.A2 IC9.A3 TP_VREG.TP

## Tracks (layer width: path | path; a pad name or v marks a point on that pad's centre or on a via)
3V3  (via drill 0.2, 0.3)
  Top 0.203: U1.P$AD23 27.84,21.21 v28,21.37
  Top 0.254: C34.1 2.43,4.7 C8.1
  Top 0.305: IC9.E2 IC9.E3 6.73,31.63 | C8.1 C19.1 | C19.1 C12.1 | C19.1 2.54,6.98 C6.1 C14.1 5.33,6.98 v6.23,6.08 v6.24,6.07 TP_3V3.TP | R5.2 8.51,3.47 C7.1 8.45,6.05 TP_3V3.TP | TP_3.3V.TP 2.15,30.61 3.16,31.62 C33.1 C25.1 6.73,31.63 | v6.49,33.15 6.93,32.72 R18.1 6.54,31.92 6.54,31.82 6.73,31.63 | IC3.7 41.65,15.75 41.36,16.04 40.43,16.04 40.15,15.76 IC3.10 39.36,15.45 v39.34,15.46 | U1.P$Y2 33.59,19.04 | 33.59,19.04 U1.P$W1 | 33.59,19.04 33.88,19.04 34.38,19.54 35.41,19.54 v35.44,19.57 | TP_3V3.TP 8.92,5.58 11.02,5.58 12.14,4.46 18.84,4.46 19.99,3.31 R8.2 | U1.P$A22 28.34,13.11 v28.54,12.91 | Q1.2 19.43,21.63 v18.65,22.41 | R17.1 11.79,32.09 v11.63,32.25 | J2.1 41.76,20.77 v41.76,18.53 | IC2.C2 36.51,31.64 v35.9,31.03 | U1.P$B1 34.26,14.29 v34.53,14.02 | R_PWR_EPD.2 27.93,21.43 v28,21.37 28.16,21.53 29.64,21.53 30.34,20.83 U1.P$AD14 | IC3.3 v41.15,13.12 v41.14,13.11 | R7.2 v36.94,5.03 v36.95,5.02
  pour Route15: 31.96,1.36 31.98,1.38 36.82,1.38 36.84,1.36 36.86,1.34 36.88,1.32 36.88,-0.42 39.4,-0.42 40.18,-0.38 40.94,-0.25 41.69,-0.04 42.4,0.26 43.08,0.64 43.72,1.09 44.3,1.6 44.81,2.18 45.26,2.82 45.64,3.5 45.94,4.21 46.15,4.96 46.28,5.72 46.32,6.5 46.32,27.5 46.28,28.28 46.15,29.04 45.94,29.79 45.64,30.5 45.26,31.18 44.81,31.82 44.3,32.4 43.72,32.91 43.08,33.36 42.4,33.74 41.69,34.04 40.94,34.25 40.18,34.38 39.4,34.42 7.4,34.42 6.62,34.38 5.86,34.25 5.11,34.04 4.4,33.74 3.72,33.36 3.08,32.91 2.5,32.4 1.99,31.82 1.54,31.18 1.16,30.5 0.86,29.79 0.65,29.04 0.52,28.28 0.48,27.5 0.48,23.98 7.42,23.98 7.44,23.96 7.46,23.94 7.48,23.92 7.48,10.08 7.46,10.06 7.44,10.04 7.42,10.02 0.48,10.02 0.48,6.5 0.52,5.72 0.65,4.96 0.86,4.21 1.16,3.5 1.54,2.82 1.99,2.18 2.5,1.6 3.08,1.09 3.72,0.64 4.4,0.26 5.11,-0.04 5.86,-0.25 6.62,-0.38 7.4,-0.42 9.92,-0.42 9.92,1.32 9.94,1.34 9.96,1.36 9.98,1.38 14.82,1.38 14.84,1.36 14.86,1.34 14.88,1.32 14.88,-0.42 20.92,-0.42 20.92,1.32 20.94,1.34 20.96,1.36 20.98,1.38 25.82,1.38 25.84,1.36 25.86,1.34 25.88,1.32 25.88,-0.42 31.92,-0.42 31.92,1.32 31.94,1.34
ALERT  (via drill 0.3)
  Top 0.152: U3.5 17.96,30.52 v18.56,30.52 | v24.56,19.01 24.56,17.67 25.94,16.29 U1.P$J24
  Bottom 0.152: v18.56,30.52 18.56,30.34 18.13,29.91 18.13,27.92 24.56,21.49 v24.56,19.01
D+
  Top 0.254: U1.P$AD6 32.34,22.53 31.52,23.35 23.09,23.35 22.83,23.61 D3.4
D-
  Top 0.254: D3.6 25.16,23.86 25.71,23.86 25.82,23.97 26.28,23.97 26.35,23.91 26.35,23.84 26.41,23.77 26.85,23.77 26.92,23.84 26.92,23.91 26.98,23.97 27.43,23.97 27.49,23.91 27.49,23.84 27.55,23.77 28,23.77 28.06,23.84 28.06,23.91 28.12,23.97 28.57,23.97 28.63,23.91 28.63,23.84 28.7,23.77 29.14,23.77 29.2,23.84 29.2,23.91 29.27,23.97 29.71,23.97 29.77,23.91 29.77,23.84 29.84,23.77 30.28,23.77 30.35,23.84 30.35,23.91 30.41,23.97 30.85,23.97 30.92,23.91 30.92,23.81 30.98,23.75 31.43,23.75 31.54,23.86 31.79,23.86 31.95,23.7 32.11,23.7 32.43,23.38 32.43,23.22 32.84,22.81 32.84,22.59 32.73,22.47 32.73,22.02 32.79,21.95 32.88,21.95 32.94,21.89 32.94,21.45 32.84,21.34 U1.P$AD4
DEC4_6  (via drill 0.2)
  Top 0.152: U1.P$B5 32.57,14.27 32.57,12.41 C15.1 32.58,12.08 32.58,11.62 C16.1 C10.1 32.22,10.29 32.98,10.29 L3.2
  Bottom 0.152: U1.P$E24 27.34,14.94 29.86,12.42 30.86,12.42 32.59,14.15 U1.P$B5
  other vias: 27.34,15.29 32.59,14.29
DN
  Top 0.152: J4.A7 23.15,27.92 23.38,27.69 23.94,27.69 24.17,27.92 | 24.17,27.92 24.17,28.45 J4.B7 | D3.1 24.73,27.36 24.17,27.92
DP
  Top 0.152: J4.A6 23.65,29.01 23.4,29.26 22.9,29.26 22.65,29.01 J4.B6 22.65,26.97 D3.3
EPD_3V3
  Top 0.305: C1-EP-DR.1 18.38,19.66 EPD_C5.2 20.34,18.95 20.38,18.99 Q1.3 L5.2 17.37,17.89 16.3,16.82 13.07,16.82 12.01,15.75 J1.15 J1.16
EPD_BUSY
  Top 0.152: J1.9 10.23,18.75 9.73,19.25 9.73,23.95 11.53,25.75 16.95,25.75 20.78,21.92 29.91,21.92 30.84,20.99 U1.P$AD12
EPD_CS  (via drill 0.2)
  Top 0.152: J1.12 10.12,17.25 9.3,16.43 9.3,8.39 12.57,5.12 24.78,5.12 v26.55,6.89 | v28.08,8 28.45,8.37 37.74,8.37 38.55,9.18 38.55,12.68 35.59,15.64 33.77,15.64 33.34,16.07 U1.P$K2
  Bottom 0.152: v26.55,6.89 26.97,6.89 v28.08,8
EPD_DC
  Top 0.152: J1.11 10.43,17.75 9.16,19.02 9.16,24.19 11.28,26.31 17.21,26.31 21.03,22.49 30.62,22.49 31.49,21.62 31.49,20.44 U1.P$AD10
EPD_RST  (via drill 0.2)
  Top 0.152: J1.10 10.33,18.25 9.45,19.13 9.45,24.07 11.41,26.03 17.08,26.03 20.91,22.2 30.3,22.2 v31.05,21.45
  Bottom 0.152: U1.P$AC11 31.09,21.41
  Bottom 0.254: 31.09,21.41 v31.05,21.45
  other vias: 31.09,19.79
GDR  (via drill 0.2)
  Top 0.152: R2_EP_DR.2 11.38,22.25 J1.2 10.2,22.25 v10.16,22.29 | v16.37,16.25 Q3.1
  Bottom 0.152: v16.37,16.25 v16.37,16.26 10.34,22.29 v10.16,22.29
GND  (via drill 0.2, 0.3)
  Top 0.152: R9.1 9.99,32.64 v9.97,32.62 | C22.2 v25.06,10.4 | v25.78,10.33 C4.2 26.45,9.62 v26.51,9.68 | C3.2 24.41,10.57 v24.43,10.59 | C29.2 35.87,5.89 | U1.P$74 U1.P$84
  Top 0.2: IC9.C1 IC9.B1 | X1.2 27.32,11.43 26.16,12.57 X1.4 26.07,13.41 v26.2,13.54 | 28.02,10.93 28.18,10.75 28.25,10.75
  Top 0.254: IC2.B1 v40.06,32.68 | C15.2 31.71,12.59 32.23,13.11 32.23,14.01 32.09,14.15 U1.P$B7 | C31.2 20.3,3.89 v19.87,4.32 | IC1.D2 10.4,30.08
  Top 0.305: IC9.C1 IC9.C2 IC9.C3 | J2.3 J2.5 40.84,24.23 v40.84,26.02 | EPD_C9.1 EPD_C8.1 EPD_C7.1 EPD_C6.1 v13.88,16.23 | EPD_C9.1 EPD_C10.1 | EPD_C10.1 EPD_C11.1 | EPD_C11.1 EPD_C12.1 v13.87,8.78 13.87,8.02 D4.1 | IC3.8 IC3.9 40.89,15.21 v40.89,14.88 | U1.P$F23 28.49,15.54 U1.P$78 | U1.P$B7 32.09,14.94 U1.P$75 | SW_UP.1 v14.97,3.47 v14.98,3.48 | J1.17 11.46,14.75 11.86,15.15 v11.86,15.2 | J1.8 11.55,19.25 v11.93,18.87 | C5.2 35.47,14.29 v35.47,14.17 | R3.2 38.29,14.68 v38.29,15.48 | C39.2 8.64,26.62 9.43,27.41 v9.45,27.41 | C1-EP-DR.2 15.96,19.77 v15.93,19.74 15.88,19.69 R_TYPE_SEL.1 | v40.06,32.68 v40.07,32.69 | C15.2 31.71,11.25 C16.2 | C16.2 31.64,11.17 C10.2 31.38,10.35 31.06,10.68 v31.06,10.82 31.42,11.18 C16.2 | SW_ENT.1 24.8,4.04 26.43,5.67 v28.39,5.67 | v36.96,5.84 36.91,5.89 35.87,5.89 | SW_DN.1 v36.94,3.47 v36.95,3.48 | J1.MP2 v8.38,9.26 v8.38,9.25 | J1.MP1 v8.38,24.39 v8.37,24.4 | C33.2 4.65,32.86 v5.17,33.38 5.21,33.34 5.21,33.31 5.55,32.97 C25.2 | 10.4,30.08 10.11,30.37 v9.89,30.37 | U3.4 17.66,28.43 18.03,28.06 18.09,28.06 J4.SH4 | TP_GND.TP 29.45,30.78 J4.SH3 27.62,28.95 27.62,27.93 26.57,26.88 R1_USB.1 | IC2.B3 40.06,31.03 v39.39,30.36 | C20.2 34.85,22.36 v34.83,22.38 | C17.1 37.52,10.87 v37.52,11.56 37.52,12.21 C18.1 | R2_EP_DR.1 14.4,23.6 v14.61,23.81 14.61,23.56 15.33,22.84 TP_BAT_GND.TP | v28.25,10.67 27.95,10.67 27.77,10.48 C1.2 27.77,11.18 X1.2 28.25,10.69 v28.25,10.67 | 28.25,10.75 v28.25,10.67 | C13.2 29.34,12.36 v29.34,11.65 29.34,11.46 29.01,11.13 C2.2 | EPD_C11.1 14.74,10.88 v14.77,10.91 | EPD_C10.1 14.73,11.82 v14.78,11.77 | EPD_C9.1 14.45,12.76 v14.77,13.08
  Route2 0.152: 10.24,30.3 10.24,30.81 10.59,31.16
  Route2 0.305: 39.16,10.82 v31.06,10.82 30.91,10.67 v28.25,10.67 25.74,10.67 24.35,9.28 | v5.17,33.38 5.53,33.02 5.53,32.63 | v37.52,11.56 37.52,11.65 37.49,11.68 37.49,12.26
  other vias: 24.38,13.08 23.48,12.66 24.4,11.17 24.6,14.29 23.56,14.57 25.05,14.76 24.48,15.41 25.49,15.23 25.45,16.12 24.36,12.42 23.47,12 24.37,11.78 23.48,11.36 25.39,8.65 29.36,5.68 23.47,13.29 24.34,13.7 24.06,14.98 23.46,13.95 24.9,15.81 23.48,10.74 23.4,10.04 24.59,8.65 23.73,8.63 23.29,9.33 28.87,6.61 5,15.5 5,22.5 5,27.5 18,14.5 18,23.5 21,7.5 33,15.5 33,25.5 35,22.5 18,3.5 13,4.5 28,7.5 31,4.5 38,14.5 40,17.5 43,19.5 40,23.5 36,26.5 29,28.5 13,23.5 8,7.5 8,12.5
  pour Route2: 31.96,1.36 31.98,1.38 36.82,1.38 36.84,1.36 36.86,1.34 36.88,1.32 36.88,-0.42 39.4,-0.42 40.18,-0.38 40.94,-0.25 41.69,-0.04 42.4,0.26 43.08,0.64 43.72,1.09 44.3,1.6 44.81,2.18 45.26,2.82 45.64,3.5 45.94,4.21 46.15,4.96 46.28,5.72 46.32,6.5 46.32,27.5 46.28,28.28 46.15,29.04 45.94,29.79 45.64,30.5 45.26,31.18 44.81,31.82 44.3,32.4 43.72,32.91 43.08,33.36 42.4,33.74 41.69,34.04 40.94,34.25 40.18,34.38 39.4,34.42 7.4,34.42 6.62,34.38 5.86,34.25 5.11,34.04 4.4,33.74 3.72,33.36 3.08,32.91 2.5,32.4 1.99,31.82 1.54,31.18 1.16,30.5 0.86,29.79 0.65,29.04 0.52,28.28 0.48,27.5 0.48,23.98 7.42,23.98 7.44,23.96 7.46,23.94 7.48,23.92 7.48,10.08 7.46,10.06 7.44,10.04 7.42,10.02 0.48,10.02 0.48,6.5 0.52,5.72 0.65,4.96 0.86,4.21 1.16,3.5 1.54,2.82 1.99,2.18 2.5,1.6 3.08,1.09 3.72,0.64 4.4,0.26 5.11,-0.04 5.86,-0.25 6.62,-0.38 7.4,-0.42 9.92,-0.42 9.92,1.32 9.94,1.34 9.96,1.36 9.98,1.38 14.82,1.38 14.84,1.36 14.86,1.34 14.88,1.32 14.88,-0.42 20.92,-0.42 20.92,1.32 20.94,1.34 20.96,1.36 20.98,1.38 25.82,1.38 25.84,1.36 25.86,1.34 25.88,1.32 25.88,-0.42 31.92,-0.42 31.92,1.32 31.94,1.34
  pour Top: 31.96,1.36 31.98,1.38 36.82,1.38 36.84,1.36 36.86,1.34 36.88,1.32 36.88,-0.42 39.4,-0.42 40.18,-0.38 40.94,-0.25 41.69,-0.04 42.4,0.26 43.08,0.64 43.72,1.09 44.3,1.6 44.81,2.18 45.26,2.82 45.64,3.5 45.94,4.21 46.15,4.96 46.28,5.72 46.32,6.5 46.32,27.5 46.28,28.28 46.15,29.04 45.94,29.79 45.64,30.5 45.26,31.18 44.81,31.82 44.3,32.4 43.72,32.91 43.08,33.36 42.4,33.74 41.69,34.04 40.94,34.25 40.18,34.38 39.4,34.42 7.4,34.42 6.62,34.38 5.86,34.25 5.11,34.04 4.4,33.74 3.72,33.36 3.08,32.91 2.5,32.4 1.99,31.82 1.54,31.18 1.16,30.5 0.86,29.79 0.65,29.04 0.52,28.28 0.48,27.5 0.48,23.98 7.42,23.98 7.44,23.96 7.46,23.94 7.48,23.92 7.48,10.08 7.46,10.06 7.44,10.04 7.42,10.02 0.48,10.02 0.48,6.5 0.52,5.72 0.65,4.96 0.86,4.21 1.16,3.5 1.54,2.82 1.99,2.18 2.5,1.6 3.08,1.09 3.72,0.64 4.4,0.26 5.11,-0.04 5.86,-0.25 6.62,-0.38 7.4,-0.42 9.92,-0.42 9.92,1.32 9.94,1.34 9.96,1.36 9.98,1.38 14.82,1.38 14.84,1.36 14.86,1.34 14.88,1.32 14.88,-0.42 20.92,-0.42 20.92,1.32 20.94,1.34 20.96,1.36 20.98,1.38 25.82,1.38 25.84,1.36 25.86,1.34 25.88,1.32 25.88,-0.42 31.92,-0.42 31.92,1.32 31.94,1.34
HAPTIC_EN
  Top 0.152: IC2.A1 40.97,32.55 43.07,32.55 44.53,31.09 44.53,28.74 45.15,28.12 45.15,18.71 44.35,17.91 36.38,17.91 35.17,19.12 34.69,19.12 33.86,18.29 U1.P$U1
IMU_INT1
  Top 0.152: IC3.5 42.62,14.42 43.35,15.15 43.35,15.62 41.66,17.31 33.98,17.31 33.96,17.29 U1.P$N1
IMU_INT2  (via drill 0.2)
  Top 0.152: v42.43,14.89 41.7,14.89 IC3.6
  Bottom 0.152: U1.P$P2 33.74,17.54 35.02,16.26 42.29,16.26 43.05,15.5 43.05,15.32 42.62,14.89 v42.43,14.89
  other vias: 33.34,17.54
LX1
  Top 0.152: IC9.B2 IC9.B3 5.89,29.82 4.54,28.47 L7.1
LX2
  Top 0.152: IC9.D2 IC9.D3 4.68,30.62 L7.2
MOSI  (via drill 0.2)
  Top 0.152: J1.14 10.54,16.25 9.86,15.56 9.86,8.63 12.81,5.68 24.16,5.68 25.46,6.98 v25.46,7.91 | v30.55,13.1 v30.56,13.09 30.56,11.95 27.67,9.06 v26.98,9.06
  Bottom 0.152: v30.55,13.1 30.55,14.25 | v26.98,9.06 26.8,9.06 25.65,7.91 v25.46,7.91
  Bottom 0.254: 30.55,14.25 U1.P$B13
  other vias: 30.59,14.29
N$1
  Top 0.152: L2.2 33.86,11.55 33.78,11.55 L3.1
N$2  (via drill 0.2)
  Top 0.152: IC9.D1 v9.05,30.62 | v12.38,33.81 12.45,33.75 R4.1
  Bottom 0.152: v9.05,30.62 9.05,31.43 11.43,33.81 v12.38,33.81
N$3
  Top 0.152: C32.1 41.84,31.64 IC2.A2
N$4
  Top 0.152: IC9.E1 8.16,31.04 R2.1
N$6
  Top 0.152: IC3.1 R3.1
N$7
  Top 0.152: U1.P$C1 C5.1
N$8
  Top 0.152: IC1.D1 R9.2
N$9
  Top 0.152: D2.1 D4.2 C2-EP-DR.1
N$10
  Top 0.152: EPD_C6.2 11.57,14.25 J1.18
N$11
  Top 0.152: SJ1.2 13.45,18.89 12.79,19.55 R_TYPE_SEL.2 12.88,19.78 12.88,20.14 14.4,20.14 14.9,20.64 14.9,22.39 14.38,22.91 R1_EP_DR.1
N$12
  Top 0.152: J4.A5 24.65,27.89 24.84,27.7 25.66,27.7 R1_USB.2
N$14
  Top 0.152: EPD_C2.2 12.03,21.3 11.07,21.3 J1.4
N$15
  Top 0.152: J1.5 12.41,20.75 EPD_C1.2
N$16
  Top 0.152: R2_USB.1 J4.B5
N$18
  Top 0.152: EPD_C7.2 12,13.75 J1.19
N$19
  Top 0.152: C2-EP-DR.2 16.86,11.78 | 16.86,11.78 16.86,11.89 Q3.3 | 16.86,11.78 18.39,13.31 L5.1 21.13,13.31 22.15,12.29 D5.2
N$20
  Top 0.152: U1.P$AC5 32.99,19.79 33.11,19.91 34.36,19.91 C20.1
N$21
  Top 0.152: EPD_C8.2 12.82,13.69 12.38,13.25 J1.20
N$22
  Top 0.152: EPD_C12.2 11.57,11.25 J1.24
N$24
  Top 0.152: J1.22 12.38,12.25 12.8,11.82 EPD_C10.2
N$40
  Top 0.152: L2.1 33.99,12.51 33.09,13.41 U1.P$B3
N$43
  Top 0.152: U1.P$A18 29.34,12.91 C13.1
N$58
  Top 0.152: C9.1 26.77,17.29 U1.P$N24
N$59
  Top 0.152: C11.1 27.61,14.81 U1.P$D23
N$60
  Top 0.152: X1.3 27.55,12.62 27.61,12.62 27.67,12.68 | U1.P$A23 27.84,12.92 27.64,12.72 27.67,12.68 | C2.1 28.31,11.78 27.67,12.68
N$61
  Top 0.152: U1.P$B24 26.03,14.29 25.31,13.57 25.31,12.09 25.98,11.43 X1.1 27.23,10.26 C1.1
N$62
  Top 0.152: L1.1 23.88,9.88 C3.1 23.92,9.93 23.92,14.26 25.37,15.71 27.44,15.71 27.77,16.04 U1.P$H23
N$63
  Top 0.152: L1.2 24.48,9.11 C22.1 C4.1 25.79,8.87 28.91,5.74 ANT1.1 28.61,3.77 28.21,4.17
OUT+
  Top 0.152: IC2.A3 42.12,31.14 TP_OP.TP
OUT-
  Top 0.152: TP_ON.TP 38.19,31.14 IC2.C3
P0.00/XL1
  Top 0.152: U1.P$D2 33.46,14.92 33.46,13.88 35.93,11.41 X2.2 36.3,10.34 C17.2
P0.00/XL2
  Top 0.152: U1.P$F2 33.59,15.29 35.25,15.29 35.93,14.61 X2.1 36.39,12.73 C18.2
P0.13  (via drill 0.2)
  Top 0.152: v10.99,4.57 v11,4.56 SW_UP.2 R5.1 10.06,3.26 9.24,2.44 C30.1 | v26.11,22.88 30.65,22.88 31.84,21.69 U1.P$AD8
  Bottom 0.152: v10.99,4.57 26.11,19.69 v26.11,22.88
P0.14  (via drill 0.2)
  Top 0.152: v28.55,7.43 29.2,8.08 37.95,8.08 41.86,11.99 41.86,13.25 43.65,15.04 43.65,15.74 41.78,17.61 35.91,17.61 v34.84,18.68 | C31.1 21.09,3.32 R8.1 21.09,3.32 SW_ENT.2 22,3.91 22.9,4.81 24.92,4.81 26.55,6.44 v27.22,6.44
  Bottom 0.152: U1.P$AC9 33.73,19.79 v34.84,18.68 | v28.55,7.43 28.43,7.43 27.44,6.44 v27.22,6.44
  other vias: 31.59,19.79
P1.01
  Top 0.152: U1.P$Y23 27.84,19.84 27.33,20.35 R_PWR_EPD.1 21.33,20.88 Q1.1
P1.02  (via drill 0.2)
  Top 0.152: C29.1 34.98,5.86 R7.1 34.95,5.06 v34.04,5.06 33,4.02 SW_DN.2 33,3.49
  Bottom 0.152: U1.P$W24 25.67,18.79 20.66,13.78 20.66,8.3 22.9,6.06 33.04,6.06 v34.04,5.06
  other vias: 27.34,18.79
PMIC_INT  (via drill 0.2)
  Top 0.152: IC1.A1 12.44,30.99 v12.6,30.99
  Bottom 0.152: v12.6,30.99 32.5,30.99 36.07,27.42 36.07,18.57 35.54,18.04 U1.P$T2
  other vias: 33.34,18.04
PREVGH
  Top 0.152: EPD_C9.2 J1.21 10.62,12.75 10.14,12.27 10.14,8.77 12.94,5.97 22.22,5.97 23.01,6.76 23.01,8.36 22.13,9.24 19.23,9.24 18.65,9.82 D5.1
PREVGL
  Top 0.152: EPD_C11.2 11.99,11.75 J1.23 10.67,11.75 10.42,11.5 10.42,8.89 13.06,6.25 21.73,6.25 22.14,6.66 D2.2
RESE  (via drill 0.2)
  Top 0.152: R1_EP_DR.2 11.57,21.77 11.04,21.77 J1.3 10.2,21.75 v10.16,21.71 | v15.08,16.25 Q3.2
  Bottom 0.152: v15.08,16.25 15.08,16.93 10.3,21.71 v10.16,21.71
RESET  (via drill 0.2)
  Top 0.152: J2.6 39.89,23.6 38.94,24.55 37.37,24.55 35.45,26.47 v35.45,26.89 34.28,28.06 TP_RESET.TP
  Bottom 0.152: U1.P$AC13 30.59,21.58 35.45,26.44 v35.45,26.89
  other vias: 30.59,19.79
SCK  (via drill 0.2)
  Top 0.152: J1.13 10.13,16.75 9.58,16.2 9.58,8.51 12.69,5.4 24.35,5.4 25.98,7.03 v25.98,7.37 | U1.P$A12 30.94,13.69 30.94,11.92 v27.54,8.52 v27.54,8.51
  Bottom 0.152: v27.54,8.51 27.12,8.51 v25.98,7.37
SCL  (via drill 0.2)
  Top 0.152: R17.2 12.98,31.87 12.81,31.69 11.66,31.69 11.53,31.56 IC1.B1 | R17.2 R4.2 13.11,33.2 TP_SCL.TP | R17.2 13.12,31.95 16.35,31.95 16.66,31.64 U3.7 16.66,31.64 17.07,32.06 39.48,32.06 IC2.C1 39.56,33.17 42.85,33.17 44.83,31.19 44.83,28.87 45.45,28.25 45.45,14.01 44.59,13.16 v43.73,13.16 | IC3.12 v39.35,14.42
  Bottom 0.152: U1.P$M2 34.43,15.95 36.23,15.95 37.76,14.42 v39.35,14.42 v39.36,14.43 42.45,14.43 v43.73,13.16
  other vias: 33.34,17.04
SDA  (via drill 0.2)
  Top 0.152: R18.2 R2.2 10.84,33.28 11.15,32.97 11.15,32.67 | 11.15,32.67 11.15,30.5 IC1.C1 | 11.15,32.67 v11.59,33.11 | U3.8 15.48,31.5 v13.52,31.5 14.37,30.65 TP_SDA.TP | v35.36,16.87 35.28,16.79 U1.P$L1 34.87,16.79 38.2,13.46 40.48,13.46 40.65,13.63 IC3.2
  Top 0.254: IC2.B2 40.04,31.66 v40.04,31.69
  Bottom 0.152: v11.59,33.11 12.04,32.66 12.36,32.66 v13.52,31.5 13.71,31.69 v40.04,31.69 40.04,30.08 36.39,26.43 36.39,17.9 v35.36,16.87
SWDCLK  (via drill 0.2)
  Top 0.152: J2.4 39.28,21.4 37.42,21.4 36.61,22.21 36.61,24.75 v34.52,26.84 32.16,29.2 TP_SWDCLK.TP
  Bottom 0.152: U1.P$AA24 27.12,19.29 26.44,19.97 26.44,21.65 31.63,26.84 v34.52,26.84
  other vias: 27.34,19.29
SWDIO  (via drill 0.2)
  Top 0.152: J2.2 39.86,20.71 39.86,19 39.13,18.27 37.38,18.27 36.08,19.57 36.08,24.73 34.56,26.25 v33.94,26.25 32.76,27.43 TP_SWDIO.TP
  Bottom 0.152: U1.P$AC24 27.34,21.75 31.84,26.25 v33.94,26.25
  other vias: 27.34,19.79
SWO  (via drill 0.2)
  Top 0.152: U1.P$AD22 28.34,20.36 v28.95,20.97 | TP_SWO.TP 33.02,25.35 v33.02,24.79
  Bottom 0.152: v33.02,24.79 29.2,20.97 v28.95,20.97
VBAT  (via drill 0.2)
  Top 0.254: v11.43,28.09 11.52,28 C27.1 C37.1 13.47,27.88 16.18,27.88 16.66,28.36 U3.2 | IC1.C2 11.13,29.57 10.99,29.43 9.97,29.43 v9.89,29.51
  Top 0.305: U3.2 U3.3 | TP_VBAT.TP 2.74,25.11 8.65,25.11 v9.91,26.37
  Bottom 0.305: v9.89,29.51 9.89,28.53 10.33,28.09 v11.43,28.09 9.91,26.57 v9.91,26.37
VBUS
  Top 0.254: C43.1 20.91,25.41 C42.1 23.54,25.41 23.78,25.17 D3.5 | IC1.A2 11.93,29.09 11.45,28.61 11.26,28.61 10.95,28.3 10.95,27.89 11.68,27.16 C38.1 20.02,27.16 C21.1
  Top 0.305: J4.A4_B9 25.8,29.02 25.18,29.64 21.63,29.64 21,29.01 J4.A9_B4 20.9,28.38 20.9,26.49 C21.1 C43.1 | D3.5 23.78,25.13 23.82,25.17 28.45,25.17 29.2,24.42 31.98,24.42 33.35,23.05 33.35,20.31 U1.P$AD2
VREG
  Top 0.254: IC9.A1 8.53,29.03 11.22,29.03 11.53,29.34 IC1.B2 | C24.2 7.13,27.76 C23.1 6.06,27.76 4.77,26.47 TP_VREG.TP
  Top 0.305: IC9.A3 IC9.A2 IC9.A1 8.14,27.81 C39.1 C24.2
(copper drawn outside any net)
  shapes: Route15 area x1, Top area x2, Top circle x3

## Text on the board
tPlace: InkTime v7 | DBG | FID1 | CHRG | FID2 | EPD | MCU | SW1-UP | SW2-EN | RF | VBAT | SW3-DN | L1 | 3V3 | SCL/SDA | S/N: | NO MTG HOLES | ANT | (case snap-fit) | FINISH: ENIG | FID3 | LEGEND: | 1oz Cu, 1mm FR4 | VREG | F1=Fuse(0R) | TP=TestPoint | USB-C
bPlace: GND pour | L2 | bot.GND